# Altium PCB 天地通门禁2074.PcbDoc (part 2 of 2)
Units mil, origin at the board's own origin, x right, y up, seen from the top; angles counter-clockwise.
Board outline 4047 x 2860 mil, 2 copper layers (Top Layer, Bottom Layer); 106 components, 66 nets, 310 pads, 377 vias.
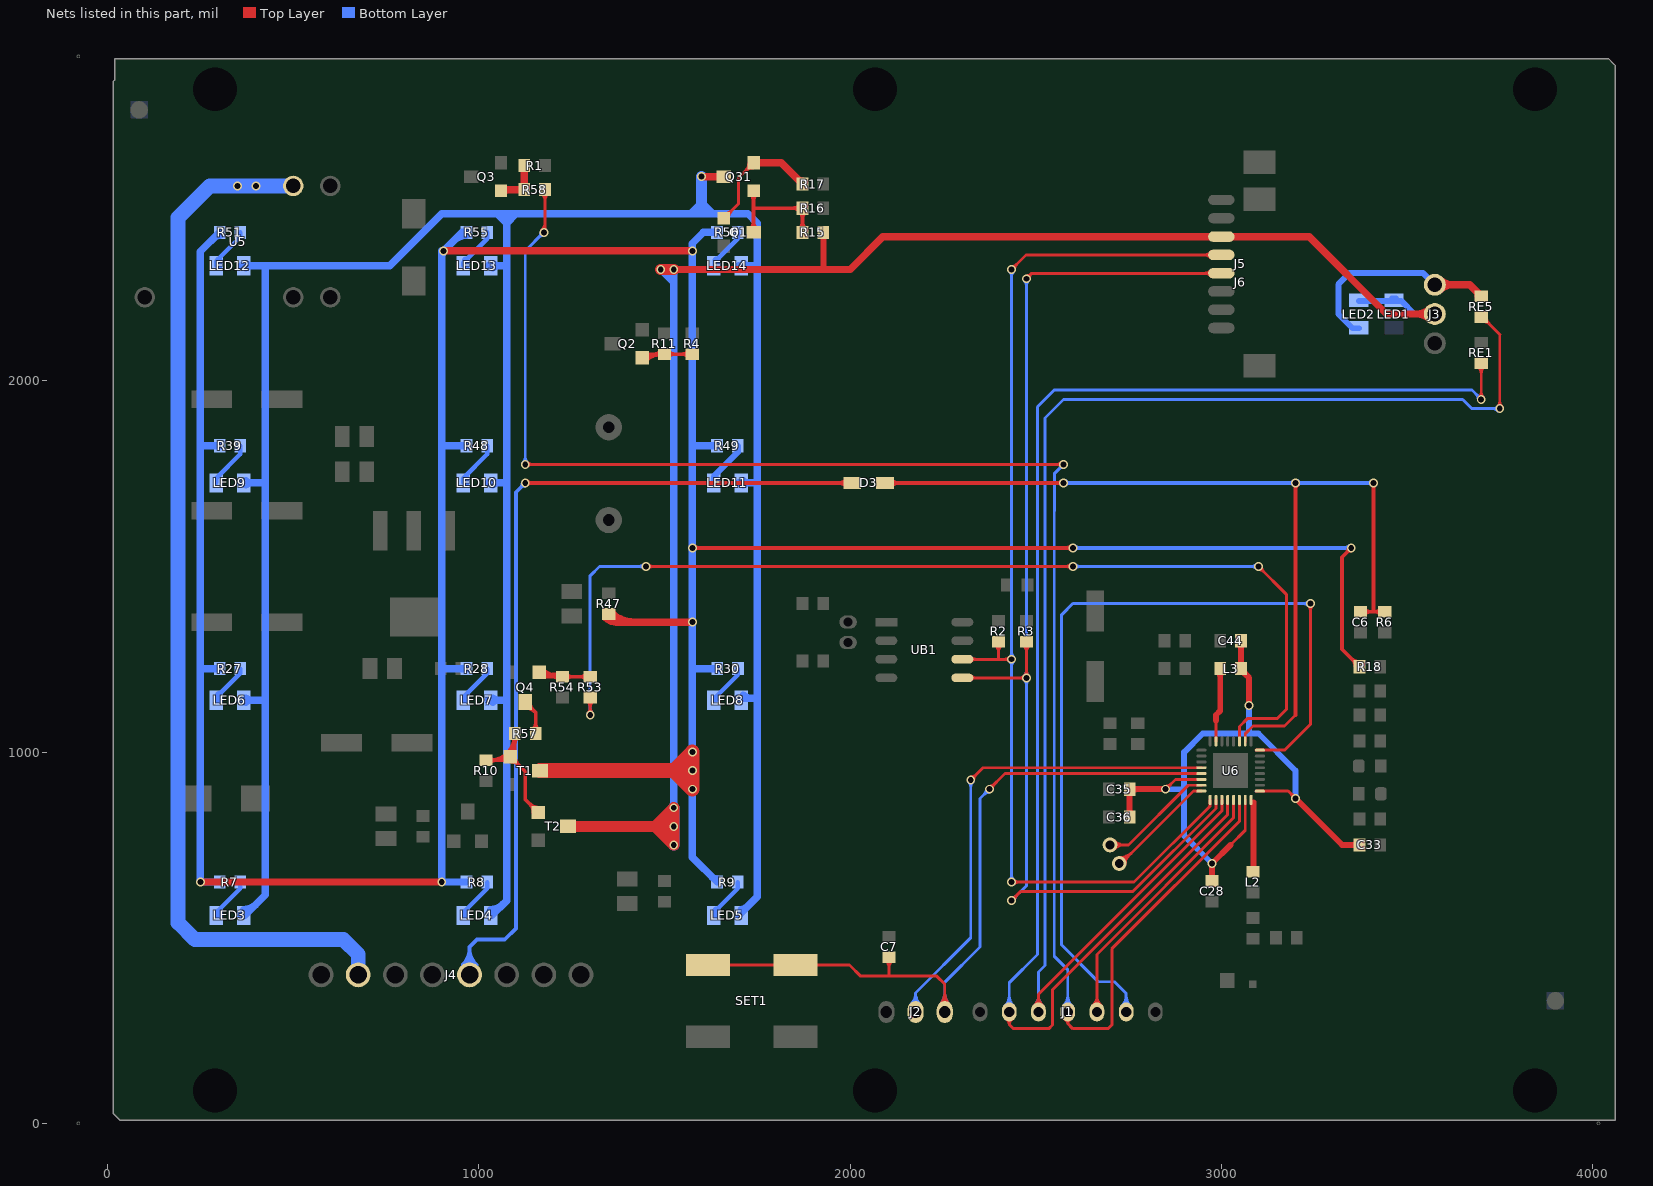
[diagram p2: the nets of this part, all layers, seen from the top]

## Via types
v1: diameter 24, hole 16, Top Layer to Bottom Layer, tented both sides, 377 vias

## Nets (pads, with @x,y where several pads share a name; then routed paths per layer and width w, separated by ;. In a path a pad name is that pad's centre, name@x,y a point inside that pad or via, vN(x,y) a via of type N, cw(c..) or ccw(c..) an arc to the next point about the centre after c; other vN are vias at no path point) (continued)
NetD3_1: D3.1 J4.4 | length 2573.6
  Top Layer w10: v1(1125,1725) D3.1@2010.63,1725 ; v1@1129.95,1720.05 cw(c1141.9,1708.1) 1141.9,1725 cw(c1141.9,1741.9) v1@1129.95,1729.95 ; D3.1@1988.35,1717.4 ccw(c1970,1699.05) 1970,1725 ccw(c1970,1750.95) D3.1@1988.35,1732.6
  Bottom Layer w10: J4.4@956.26,426.61 ccw(c911.03,471.84) 975,471.84 ccw(c1038.97,471.84) J4.4@993.74,426.61 ; J4.4@963.34,419.54 ccw(c935.18,447.7) 975,447.7 ccw(c1014.82,447.7) J4.4@986.66,419.54 ; J4.4@975,400 975,475 995,495 1070,495 1100,525 1100,1700 v1(1125,1725) ; v1@1118,1725 cw(c1101.1,1725) 1113.05,1713.05 cw(c1125,1701.1) v1@1125,1718
NetL2_2: L2.2 U6.32 | length 217.3
  Top Layer w15.75: L2.2@3081.4,683.57 ccw(c3069.86,695.11) 3086.18,695.11 ; L2.2@3085,678 3086.18,679.18 3086.18,865 ; 3086.18,698.91 ccw(c3107.88,698.91) L2.2@3092.54,683.57
NetL3_2: L3.2 U6.15 | length 230.8
  Top Layer w7.87: U6.15@2985.63,1028.74 2985.63,1085
  Top Layer w15.75: 2985.63,1085 2985.63,1100 2997,1111.37 L3.2@2997,1225 ; L3.2@2991.43,1217.46 cw(c2977.99,1204.02) 2997,1204.02 cw(c3016.01,1204.02) L3.2@3002.57,1217.46
NetLED3_1: LED3.1 R7.2 | length 126.6
  Bottom Layer w12: LED3.1@292.68,560 292.68,567.69 357.68,632.69 R7.2@357.68,650
  Bottom Layer w20: LED3.1@299.68,560 LED3.1@299.68,569.69
NetLED3_2: LED3.2 LED4.2 LED5.2 LED6.2 LED7.2 LED8.2 LED9.2 LED10.2 LED11.2 LED12.2 LED13.2 LED14.2 Q31.C | length 8163.8
  Top Layer w20: v1(1600,2550) Q31.C@1660,2550
  Bottom Layer w20: LED3.2@359.68,560 370,560 425,615 425,1140 ; LED6.2@359.68,1140 425,1140 ; LED9.2@359.68,1725 425,1725 ; LED12.2@359.68,2310 425,2310 ; LED3.2@366.68,576 ccw(c366.68,622.63) 399.66,589.66 ; LED6.2@372.34,1134.34 cw(c386,1120.69) 386,1140 cw(c386,1159.31) LED6.2@372.34,1145.66 ; LED9.2@372.34,1719.34 cw(c386,1705.69) 386,1725 cw(c386,1744.31) LED9.2@372.34,1730.66 ; LED12.2@372.34,2304.34 cw(c386,2290.69) 386,2310 cw(c386,2329.31) LED12.2@372.34,2315.66 ; LED4.2@1024.68,560 1035,560 1075,600 1075,1140 ; LED7.2@1024.68,1140 1075,1140 ; LED10.2@1024.68,1725 1075,1725 ; LED13.2@1024.68,2310 1075,2310 ; LED4.2@1031.68,576 ccw(c1031.68,622.63) 1064.66,589.66 ; LED7.2@1037.34,1134.34 cw(c1051,1120.69) 1051,1140 cw(c1051,1159.31) LED7.2@1037.34,1145.66 ; LED10.2@1037.34,1719.34 cw(c1051,1705.69) 1051,1725 cw(c1051,1744.31) LED10.2@1037.34,1730.66 ; LED13.2@1037.34,2304.34 cw(c1051,2290.69) 1051,2310 cw(c1051,2329.31) LED13.2@1037.34,2315.66 ; 1600,2475 1600,2450 ; 1650,2450 1630,2450 ; LED5.2@1699.68,560 1750,610.32 1750,1145 ; LED8.2@1699.68,1145 1750,1145 ; LED11.2@1699.68,1725 1750,1725 ; LED14.2@1699.68,2310 1750,2310 ; LED5.2@1706.68,576 ccw(c1706.68,597.73) LED5.2@1722.05,582.36 ; LED11.2@1712.34,1719.34 cw(c1726,1705.69) 1726,1725 cw(c1726,1744.31) LED11.2@1712.34,1730.66 ; LED14.2@1712.34,2304.34 cw(c1726,2290.69) 1726,2310 cw(c1726,2329.31) LED14.2@1712.34,2315.66 ; LED8.2@1712.66,1153.66 ccw(c1733.56,1174.56) 1733.56,1145 ; 425,1140 425,1725 ; 425,1725 425,2310 ; 425,2310 760,2310 900,2450 1050,2450 ; 1050,2450 1075,2450 ; 1050,2450 1075,2425 ; 1075,1140 1075,1725 ; 1075,1725 1075,2310 ; 1075,2310 1075,2425 ; 1075,2425 1075,2450 ; 1075,2425 1100,2450 ; 1075,2450 1100,2450 ; 1100,2450 1570,2450 ; 1570,2450 1600,2450 ; 1570,2450 1600,2480 1630,2450 ; 1600,2450 1630,2450 ; 1630,2450 1725,2450 1750,2425 1750,2310 ; 1750,1145 1750,1725 ; 1750,1725 1750,2310
  Bottom Layer w30: 1600,2480 v1(1600,2550)
NetLED4_1: LED4.1 R8.2 | length 126.6
  Bottom Layer w12: LED4.1@957.68,560 957.68,567.69 1022.68,632.69 R8.2@1022.68,650
  Bottom Layer w20: LED4.1@964.68,560 LED4.1@964.68,569.69
NetLED5_1: LED5.1 R9.2 | length 131.6
  Bottom Layer w12: LED5.1@1632.68,560 1632.68,567.69 1639.68,574.69 1697.68,632.69 R9.2@1697.68,650
  Bottom Layer w20: LED5.1@1639.68,560 LED5.1@1639.68,574.69
NetLED6_1: LED6.1 R27.2 | length 126.6
  Bottom Layer w12: LED6.1@292.68,1140 292.68,1147.69 299.68,1154.69 357.68,1212.69 R27.2@357.68,1225
  Bottom Layer w20: LED6.1@299.68,1140 LED6.1@299.68,1154.69
NetLED7_1: LED7.1 R28.2 | length 121.6
  Bottom Layer w12: LED7.1@957.68,1140 957.68,1147.69 1022.68,1212.69 R28.2@1022.68,1225
  Bottom Layer w20: LED7.1@964.68,1140 LED7.1@964.68,1149.69
NetLED8_1: LED8.1 R30.2 | length 112.2
  Bottom Layer w12: LED8.1@1633,1140 1633,1143 1698,1208 R30.2@1698,1225
  Bottom Layer w20: LED8.1@1639.68,1145 LED8.1@1640,1145
NetLED9_1: LED9.1 R39.2 | length 126.9
  Bottom Layer w12: LED9.1@292.68,1725 292.68,1737.69 357.68,1802.69 R39.2@357.68,1825
NetLED10_1: LED10.1 R48.2 | length 141.6
  Bottom Layer w12: LED10.1@957.68,1725 957.68,1737.69 1022.68,1802.69 R48.2@1022.68,1825
  Bottom Layer w20: LED10.1@964.68,1725 LED10.1@964.68,1739.69
NetLED11_1: LED11.1 R49.2 | length 136.6
  Bottom Layer w16: LED11.1@1632.68,1725 1632.68,1742.69 1697.68,1807.69 R49.2@1697.68,1825
  Bottom Layer w20: LED11.1@1639.68,1725 LED11.1@1639.68,1734.69
NetLED12_1: LED12.1 R51.2 | length 131.6
  Bottom Layer w12: LED12.1@292.68,2310 292.68,2322.69 357.68,2387.69 R51.2@357.68,2400
  Bottom Layer w20: LED12.1@299.68,2310 LED12.1@299.68,2324.69
NetLED13_1: LED13.1 R55.2 | length 131.6
  Bottom Layer w12: LED13.1@957.68,2310 957.68,2317.69 964.68,2324.69 1022.68,2382.69 R55.2@1022.68,2400
  Bottom Layer w20: LED13.1@964.68,2310 LED13.1@964.68,2324.69
NetLED14_1: LED14.1 R56.2 | length 114
  Bottom Layer w12: LED14.1@1639.68,2324.69 1697.68,2382.69 R56.2@1697.68,2400
  Bottom Layer w20: LED14.1@1639.68,2310 LED14.1@1639.68,2324.69
NetQ1_B: Q1.B Q31.E R17.2 | length 450.1
  Top Layer w8: Q1.B@1660,2437.4 1700,2477.4 1700,2547.4 Q31.E@1740,2587.4 ; Q1.B@1660,2450.13 ccw(c1660,2480.87) 1681.74,2459.14 ccw(c1703.47,2437.4) Q1.B@1672.73,2437.4 ; 1716.1,2563.5 cw(c1740,2539.6) Q31.E@1740,2573.4 ; 1719.16,2566.56 ccw(c1699.59,2586.13) Q31.E@1727.27,2586.13
  Top Layer w20: Q31.E@1740,2587.4 1814.6,2587.4 R17.2@1872,2530 ; R17.2@1858.83,2543.17 ccw(c1872,2556.35) R17.2@1872,2537.72
NetQ1_C: Q1.C Q31.B R15.1 R16.2 | length 520.9
  Top Layer w10: Q1.C@1731.7,2408.3 ccw(c1711.68,2428.32) 1740,2428.32 ccw(c1768.32,2428.32) Q1.C@1748.3,2408.3 ; Q31.B@1731.7,2504.3 cw(c1711.68,2484.27) 1740,2484.27 cw(c1768.32,2484.27) Q31.B@1748.3,2504.3 ; Q1.C@1740,2400 1740,2465 ; Q31.B@1740,2512.6 1740,2465 ; R15.1@1864.4,2409.57 ccw(c1846.05,2427.92) 1872,2427.92 ccw(c1897.95,2427.92) R15.1@1879.6,2409.57 ; R16.2@1864.4,2455.43 cw(c1846.05,2437.08) 1872,2437.08 cw(c1897.95,2437.08) R16.2@1879.6,2455.43 ; R16.2@1864.4,2457.4 ccw(c1846.05,2439.05) 1846.05,2465 ccw(c1846.05,2490.95) R16.2@1864.4,2472.6 ; R15.1@1872,2400 R16.2@1872,2465 1740,2465
NetQ2_1: Q2.1 R4.1 R11.1 | length 341.9
  Top Layer w10: Q2.1@1440,2062.6 1449.4,2072 R11.1@1500,2072 R4.1@1575,2072 ; Q2.1@1442.12,2060.48 cw(c1469.94,2032.66) 1469.94,2072 ; Q2.1@1449.19,2053.41 cw(c1494.08,2008.51) R11.1@1494.08,2072 ; R11.1@1490.43,2064.4 ccw(c1472.08,2046.05) 1472.08,2072 ccw(c1472.08,2097.95) R11.1@1490.43,2079.6 ; R11.1@1509.57,2064.4 cw(c1527.92,2046.05) 1527.92,2072 cw(c1527.92,2097.95) R11.1@1509.57,2079.6 ; R4.1@1565.43,2064.4 ccw(c1547.08,2046.05) 1547.08,2072 ccw(c1547.08,2097.95) R4.1@1565.43,2079.6
NetQ3_B: Q3.B R1.2 R58.2 | length 147.5
  Top Layer w20: Q3.B@1059.68,2512.6 1062.09,2515 R58.2@1122,2515 R1.2@1122,2580 ; Q3.B@1064.45,2507.84 cw(c1081.74,2490.55) 1081.74,2515
NetQ4_1: Q4.1 R53.2 R54.2 | length 400.3
  Top Layer w10: Q4.1@1162.4,1215 1174.4,1203 R54.2@1225,1203 R53.2@1300,1203 ; Q4.1@1164.52,1217.12 ccw(c1198.62,1251.21) 1198.62,1203 ; Q4.1@1171.59,1224.19 ccw(c1222.76,1275.36) R54.2@1222.76,1203 ; 1197.78,1209.69 ccw(c1204.56,1234.99) R54.2@1217.66,1212.31 ; 1198.11,1209.6 cw(c1191.46,1184.77) R54.2@1213.72,1197.63 ; R54.2@1215.43,1195.4 ccw(c1197.08,1177.05) 1197.08,1203 ccw(c1197.08,1228.95) R54.2@1215.43,1210.6 ; R54.2@1234.57,1195.4 cw(c1252.92,1177.05) 1252.92,1203 cw(c1252.92,1228.95) R54.2@1234.57,1210.6 ; R53.2@1290.43,1195.4 ccw(c1272.08,1177.05) 1272.08,1203 ccw(c1272.08,1228.95) R53.2@1290.43,1210.6
NetQ4_3: Q4.3 R57.2 | length 186
  Top Layer w10: Q4.3@1125,1135 1153,1107 ; Q4.3@1125.15,1118.35 cw(c1125.6,1079.6) 1153,1107 ; Q4.3@1138,1131.35 ccw(c1160.56,1131.35) 1144.61,1115.39 ; R57.2@1145.4,1059.57 ccw(c1127.05,1077.92) 1153,1077.92 ccw(c1178.95,1077.92) R57.2@1160.6,1059.57 ; R57.2@1153,1050 1153,1107
NetR10_2: R10.2 R57.1 T1.G T2.G | length 673.4
  Top Layer w10: R10.2@1019.68,978 1075.6,978 T1.G@1085,987.4 ; R10.2@1029.25,970.4 cw(c1047.6,952.05) 1047.6,978 cw(c1047.6,1003.95) R10.2@1029.25,985.6 ; R10.2@1030.92,978 ccw(c1030.92,1041.49) 1075.81,996.59 ccw(c1024.64,1047.76) R57.1@1097,1047.76 ; 1055.06,978 ccw(c1055.06,1017.34) 1082.88,989.52 ccw(c1048.79,1023.62) 1097,1023.62 ; T1.G@1085,974.4 cw(c1085,943.02) 1107.19,965.21 cw(c1129.38,987.4) T1.G@1098,987.4 ; R57.1@1089.4,1040.43 cw(c1071.05,1022.08) 1097,1022.08 cw(c1122.95,1022.08) R57.1@1104.6,1040.43 ; R57.1@1097,1050 1097,999.4 T1.G@1085,987.4 ; T2.G@1147,837.4 ccw(c1115.62,837.4) 1137.81,859.59 ccw(c1160,881.79) T2.G@1160,850.4 ; T2.G@1160,837.4 1125,872.4 1125,947.4 T1.G@1085,987.4
NO: J4.7 U5.3 | length 2820.4
  Bottom Layer w40: U5.3@500,2525 275,2525 190,2440 190,540 235,495 635,495 675,455 J4.7@675,400
  other v1: 350,2525 400,2525
P04/LED_RED: J1.3 RE5.2 U6.27 | length 4133.5
  Top Layer w7.87: J1.3@2496.34,317.04 ccw(c2469.46,343.92) 2507.48,343.92 ccw(c2545.5,343.92) J1.3@2518.62,317.04 ; J1.3@2507.48,300 2507.48,347.48 3001.38,841.38 U6.27@3001.38,871.26 ; v1@3744.3,1930.7 ccw(c3730.53,1944.47) 3750,1944.47 ccw(c3769.47,1944.47) v1@3755.7,1930.7 ; v1(3750,1925) 3750,2125
  Top Layer w8: RE5.2@3700,2172 3703,2172 3750,2125 ; RE5.2@3701.97,2160.25 cw(c3701.97,2129.4) 3723.78,2151.22 ; RE5.2@3713.72,2172 ccw(c3739.59,2172) 3721.29,2153.71
  Bottom Layer w7.87: 2525,1765 2525,1900 2575,1950 3650,1950 3675,1925 v1(3750,1925) ; v1@3744.3,1919.3 ccw(c3730.53,1905.53) 3730.53,1925 ccw(c3730.53,1944.47) v1@3744.3,1930.7
  Bottom Layer w8: J1.3@2496.39,317 ccw(c2469.61,343.77) 2507.48,343.77 ccw(c2545.35,343.77) J1.3@2518.57,317 ; J1.3@2507.48,300 2507.48,407.48 2525,425 2525,1765
P05/LED_GREEN: J1.2 RE1.2 U6.28 | length 4143.3
  Top Layer w7.87: J1.2@2420.63,280.6 cw(c2412.02,266.26) 2428.74,266.26 ; J1.2@2428.74,300 2428.74,266.26 ; J1.2@2436.85,280.6 ccw(c2445.46,266.26) 2428.74,266.26 ; U6.28@3017.13,871.26 3017.13,832.13 2545,360 2545,265 2535,255 2440,255 2428.74,266.26 ; RE1.2@3691.65,2038.65 cw(c3671.49,2018.49) 3700,2018.49 cw(c3728.51,2018.49) RE1.2@3708.35,2038.65 ; v1@3694.3,1955.7 ccw(c3680.53,1969.47) 3700,1969.47 ccw(c3719.47,1969.47) v1@3705.7,1955.7 ; v1(3700,1950) RE1.2@3700,2047
  Bottom Layer w7.87: J1.2@2417.6,317.04 ccw(c2390.72,343.92) 2428.74,343.92 ccw(c2466.76,343.92) J1.2@2439.88,317.04 ; J1.2@2428.74,300 2428.74,378.74 2505,455 2505,1930 2550,1975 3675,1975 v1(3700,1950) ; v1@3691.94,1950 ccw(c3672.47,1950) 3686.24,1963.76 ccw(c3700,1977.53) v1@3700,1958.06
P06/MOTO1: J1.5 U6.29 | length 783.4
  Top Layer w7.87: J1.5@2653.83,317.04 ccw(c2626.94,343.92) 2664.96,343.92 ccw(c2702.98,343.92) J1.5@2676.1,317.04 ; J1.5@2664.96,300 2664.96,454.96 3032.87,822.87 U6.29@3032.87,871.26
P07/MOTO0: J1.4 R58.1 U6.30 | length 4935.3
  Top Layer w7.87: v1@1169.3,2405.7 ccw(c1148.29,2426.71) 1178,2426.71 ; R58.1@1169.65,2504.68 cw(c1149.49,2484.52) 1178,2484.52 cw(c1206.51,2484.52) R58.1@1186.35,2504.68 ; v1(1175,2400) 1178,2403 R58.1@1178,2515 ; 1178,2412.22 ccw(c1187.22,2412.22) v1@1180.7,2405.7 ; J1.4@2579.26,279.97 cw(c2573.75,268.78) 2586.22,268.78 ; J1.4@2586.22,300 2586.22,268.78 ; J1.4@2593.18,279.97 ccw(c2598.69,268.78) 2586.22,268.78 ; U6.30@3048.62,871.26 3048.62,813.62 2705,470 2705,265 2695,255 2600,255 2586.22,268.78
  Top Layer w8: v1(1125,1775) v1(2575,1775) ; v1@1130.66,1769.34 cw(c1144.31,1755.69) 1144.31,1775 cw(c1144.31,1794.31) v1@1130.66,1780.66 ; v1@2569.34,1769.34 ccw(c2555.69,1755.69) 2555.69,1775 ccw(c2555.69,1794.31) v1@2569.34,1780.66
  Bottom Layer w7.87: 2550,1650 2550,450 2586.22,413.78 J1.4@2586.22,300 ; J1.4@2575.08,317.04 ccw(c2548.2,343.92) 2586.22,343.92 ccw(c2624.24,343.92) J1.4@2597.36,317.04
  Bottom Layer w8: v1@1119.34,1780.66 ccw(c1105.69,1794.31) 1125,1794.31 ccw(c1144.31,1794.31) v1@1130.66,1780.66 ; v1(1125,1775) 1125,2350 v1(1175,2400) ; v1@1167,2400 cw(c1147.69,2400) 1161.34,2386.34 cw(c1175,2372.69) v1@1175,2392 ; 2550,1650 2550,1750 v1(2575,1775) ; v1@2567,1775 cw(c2547.69,1775) 2561.34,1761.34 cw(c2575,1747.69) v1@2575,1767
PWR_CTL: R53.1 U6.11 | length 3121.4
  Top Layer w7.87: U6.11@3048.62,1028.74 3048.62,1068.62 3070,1090 3150,1090 3175,1115 3175,1425 v1(3100,1500) ; v1@3100,1491.94 cw(c3100,1472.47) 3113.76,1486.24 cw(c3127.53,1500) v1@3108.06,1500
  Top Layer w8: R53.1@1291.69,1138.69 cw(c1271.64,1118.64) 1300,1118.64 cw(c1328.36,1118.64) R53.1@1308.31,1138.69 ; v1@1294.34,1105.66 ccw(c1280.69,1119.31) 1300,1119.31 ccw(c1319.31,1119.31) v1@1305.66,1105.66 ; v1(1300,1100) R53.1@1300,1147 ; v1(1450,1500) v1(2600,1500) ; v1@1455.66,1494.34 cw(c1469.31,1480.69) 1469.31,1500 cw(c1469.31,1519.31) v1@1455.66,1505.66 ; v1@2594.34,1494.34 ccw(c2580.69,1480.69) 2580.69,1500 ccw(c2580.69,1519.31) v1@2594.34,1505.66
  Bottom Layer w8: v1@1294.34,1105.66 ccw(c1280.69,1119.31) 1300,1119.31 ccw(c1319.31,1119.31) v1@1305.66,1105.66 ; v1(1300,1100) 1300,1475 1325,1500 v1(1450,1500) ; v1@1444.34,1494.34 ccw(c1430.69,1480.69) 1430.69,1500 ccw(c1430.69,1519.31) v1@1444.34,1505.66 ; v1(2600,1500) v1(3100,1500) ; v1@2605.66,1494.34 cw(c2619.31,1480.69) 2619.31,1500 cw(c2619.31,1519.31) v1@2605.66,1505.66 ; v1@3094.34,1494.34 ccw(c3080.69,1480.69) 3080.69,1500 ccw(c3080.69,1519.31) v1@3094.34,1505.66
RD1: pad.2@2700,750 U6.23 | length 373.7
  Top Layer w7.87: pad.2@2700,750 2750,750 2910.63,910.63 U6.23@2946.26,910.63 ; pad.2@2711.36,738.64 cw(c2738.78,711.22) 2738.78,750 cw(c2738.78,788.78) pad.2@2711.36,761.36
RED: J3.1 LED2.2 RE5.1 | length 663.5
  Top Layer w20: J3.1@3575,2258.74 3669.26,2258.74 RE5.1@3700,2228 ; J3.1@3588.81,2244.93 cw(c3622.14,2211.6) 3622.14,2258.74 cw(c3622.14,2305.88) J3.1@3588.81,2272.55 ; RE5.1@3686.83,2241.17 cw(c3673.65,2228) RE5.1@3692.28,2228
  Bottom Layer w16: LED2.2@3370.83,2141.63 3353.37,2141.63 3315,2180 3315,2260 3345,2290 3543.74,2290 J3.1@3575,2258.74
REMOTO: C6.2 D3.2 R6.1 U6.10 | length 2843
  Top Layer w7.87: U6.10@3064.37,1028.74 3064.37,1049.37 3085,1070 3170,1070 3200,1100
  Top Layer w10: D3.2@2089.37,1725 v1(2575,1725) ; D3.2@2111.65,1717.4 cw(c2130,1699.05) 2130,1725 cw(c2130,1750.95) D3.2@2111.65,1732.6 ; v1@2570.05,1720.05 ccw(c2558.1,1708.1) 2558.1,1725 ccw(c2558.1,1741.9) v1@2570.05,1729.95 ; v1@3195.05,1720.05 cw(c3183.1,1708.1) 3200,1708.1 cw(c3216.9,1708.1) v1@3204.95,1720.05 ; 3200,1100 v1(3200,1725) ; C6.2@3375,1378 3410,1378 ; C6.2@3384.57,1370.4 cw(c3402.92,1352.05) 3402.92,1378 cw(c3402.92,1403.95) C6.2@3384.57,1385.6 ; v1@3405.05,1720.05 cw(c3393.1,1708.1) 3410,1708.1 cw(c3426.9,1708.1) v1@3414.95,1720.05 ; v1(3410,1725) 3410,1378 ; R6.1@3430.43,1370.4 ccw(c3412.08,1352.05) 3412.08,1378 ccw(c3412.08,1403.95) R6.1@3430.43,1385.6 ; R6.1@3440,1378 3410,1378
  Bottom Layer w10: v1(2575,1725) v1(3200,1725) v1(3410,1725) ; v1@2579.95,1720.05 cw(c2591.9,1708.1) 2591.9,1725 cw(c2591.9,1741.9) v1@2579.95,1729.95 ; v1@3195.05,1720.05 ccw(c3183.1,1708.1) 3183.1,1725 ccw(c3183.1,1741.9) v1@3195.05,1729.95 ; v1@3204.95,1720.05 cw(c3216.9,1708.1) 3216.9,1725 cw(c3216.9,1741.9) v1@3204.95,1729.95 ; v1@3405.05,1720.05 ccw(c3393.1,1708.1) 3393.1,1725 ccw(c3393.1,1741.9) v1@3405.05,1729.95
RSTN: J1.6 U6.8 | length 2471.1
  Top Layer w7.87: U6.8@3093.74,1005.12 3170.12,1005.12 3240,1075 v1(3240,1400) ; v1@3234.3,1394.3 cw(c3220.53,1380.53) 3240,1380.53 cw(c3259.47,1380.53) v1@3245.7,1394.3
  Bottom Layer w7.87: J1.6@2732.57,317.04 ccw(c2705.68,343.92) 2743.7,343.92 ccw(c2781.72,343.92) J1.6@2754.84,317.04 ; J1.6@2743.7,300 2743.7,350 2712.4,381.3 2668.7,381.3 2570,480 2570,1370 2600,1400 v1(3240,1400) ; v1@3234.3,1394.3 ccw(c3220.53,1380.53) 3220.53,1400 ccw(c3220.53,1419.47) v1@3234.3,1405.7
RX2/SETKEY: C7.1 J2.1 SET1.2 SET1.2/2 U6.21 | length 2494
  Top Layer w7.87: v1(2375,900) 2417.06,942.06 2481.55,942.06 2481.61,942.13 U6.21@2936.26,942.13 ; v1@2375,908.06 ccw(c2375,927.53) 2388.76,913.76 ccw(c2402.53,900) v1@2383.06,900
  Top Layer w8: SET1.2/2@1616.89,426.46 SET1.2@1853.11,426.46 1998.54,426.46 2028.54,396.46 2105,396.46 ; SET1.2@1865.84,413.73 cw(c1896.57,383) 1896.57,426.46 cw(c1896.57,469.91) SET1.2@1865.84,439.18 ; SET1.2@1871.49,408.07 cw(c1915.88,363.69) 1915.88,426.46 cw(c1915.88,489.23) SET1.2@1871.49,444.84 ; C7.1@2096.69,438.69 cw(c2076.64,418.64) 2105,418.64 cw(c2133.36,418.64) C7.1@2113.31,438.69 ; C7.1@2105,447 2105,396.46 ; J2.1@2242.52,320.36 ccw(c2212.38,350.49) 2255,350.49 ccw(c2297.62,350.49) J2.1@2267.48,320.36 ; J2.1@2248.17,314.7 ccw(c2231.69,331.18) 2255,331.18 ccw(c2278.31,331.18) J2.1@2261.83,314.7 ; J2.1@2255,300 2255,375 2233.54,396.46 2105,396.46
  Bottom Layer w7.87: J2.1@2242.47,320.4 ccw(c2212.23,350.65) 2255,350.65 ccw(c2297.77,350.65) J2.1@2267.53,320.4 ; J2.1@2248.04,314.83 ccw(c2231.24,331.64) 2255,331.64 ccw(c2278.76,331.64) J2.1@2261.96,314.83 ; J2.1@2255,300 2255,380 2350,475 2350,875 v1(2375,900) ; v1@2366.94,900 cw(c2347.47,900) 2361.24,886.24 cw(c2375,872.47) v1@2375,891.94
SCL: J5.5 J6.5 R2.2 U6.25 UB1.6 | length 3419.9
  Top Layer w7.87: 2535,650 2765,650 2969.88,854.88 U6.25@2969.88,871.26 ; 2965.26,850.26 ccw(c2954.1,861.42) U6.25@2969.88,861.42
  Top Layer w8: UB1.6@2302.36,1250 2400,1250 ; UB1.6@2325.6,1244.48 cw(c2338.94,1231.14) 2338.94,1250 cw(c2338.94,1268.86) UB1.6@2325.6,1255.52 ; R2.2@2391.69,1288.69 cw(c2371.64,1268.64) 2400,1268.64 cw(c2428.36,1268.64) R2.2@2408.31,1288.69 ; R2.2@2400,1297 2400,1250 ; v1@2429.34,1244.34 ccw(c2415.69,1230.69) 2415.69,1250 ccw(c2415.69,1269.31) v1@2429.34,1255.66 ; v1(2435,650) 2535,650 ; v1(2435,1250) 2400,1250 ; v1(2435,2300) 2473.82,2338.82 J6.5@3000,2338.82 ; v1@2435,2308 ccw(c2435,2327.31) 2448.66,2313.66 ccw(c2462.31,2300) v1@2443,2300 ; v1@2440.66,644.34 cw(c2454.31,630.69) 2454.31,650 cw(c2454.31,669.31) v1@2440.66,655.66 ; 2952.84,2338.82 ccw(c2952.84,2365.12) J6.5@2971.43,2346.52 ; 2956.64,2338.82 cw(c2956.64,2317.9) J6.5@2971.43,2332.69 ; J6.5@2971.43,2331.9 ccw(c2954.74,2315.21) 2954.74,2338.82 ccw(c2954.74,2362.43) J6.5@2971.43,2345.73
  Bottom Layer w7.87: 2435,2090 2435,2145
  Bottom Layer w8: v1@2429.34,655.66 ccw(c2415.69,669.31) 2435,669.31 ccw(c2454.31,669.31) v1@2440.66,655.66 ; v1@2429.34,1244.34 cw(c2415.69,1230.69) 2435,1230.69 cw(c2454.31,1230.69) v1@2440.66,1244.34 ; v1@2429.34,1255.66 ccw(c2415.69,1269.31) 2435,1269.31 ccw(c2454.31,1269.31) v1@2440.66,1255.66 ; v1@2429.34,2294.34 cw(c2415.69,2280.69) 2435,2280.69 cw(c2454.31,2280.69) v1@2440.66,2294.34 ; v1(2435,650) v1(2435,1250) 2435,2090 ; 2435,2145 v1(2435,2300)
SDA: J5.4 J6.4 R3.2 U6.26 UB1.5 | length 3559.7
  Top Layer w7.87: 2635,625 2762.27,625 2985.63,848.36 U6.26@2985.63,871.26
  Top Layer w8: UB1.5@2302.36,1200 v1(2475,1200) R3.2@2475,1297 ; UB1.5@2325.6,1194.48 cw(c2338.94,1181.14) 2338.94,1200 cw(c2338.94,1218.86) UB1.5@2325.6,1205.52 ; v1(2435,600) 2460,625 2635,625 ; v1@2435,608 ccw(c2435,627.31) 2448.66,613.66 ccw(c2462.31,600) v1@2443,600 ; R3.2@2466.69,1288.69 cw(c2446.64,1268.64) 2475,1268.64 cw(c2503.36,1268.64) R3.2@2483.31,1288.69 ; v1@2469.34,1194.34 ccw(c2455.69,1180.69) 2455.69,1200 ccw(c2455.69,1219.31) 2469.34,1205.66 ccw(c2455.69,1219.31) 2475,1219.31 ccw(c2494.31,1219.31) v1@2480.66,1205.66 ; v1(2475,2275) 2489.61,2289.61 J6.4@3000,2289.61 ; v1@2475,2283 ccw(c2475,2302.31) 2488.66,2288.66 ccw(c2502.31,2275) v1@2483,2275 ; 2952.84,2289.61 ccw(c2952.84,2315.9) J6.4@2971.43,2297.31 ; 2956.64,2289.61 cw(c2956.64,2268.68) J6.4@2971.43,2283.48 ; J6.4@2971.43,2282.69 ccw(c2954.74,2266) 2954.74,2289.61 ccw(c2954.74,2313.22) J6.4@2971.43,2296.52
  Bottom Layer w8: v1(2435,600) 2475,640 v1(2475,1200) v1(2475,2275) ; v1@2435,608 ccw(c2435,627.31) 2448.66,613.66 ccw(c2462.31,600) v1@2443,600 ; v1@2469.34,1194.34 cw(c2455.69,1180.69) 2475,1180.69 cw(c2494.31,1180.69) v1@2480.66,1194.34 ; v1@2469.34,1205.66 ccw(c2455.69,1219.31) 2475,1219.31 ccw(c2494.31,1219.31) v1@2480.66,1205.66 ; v1@2469.34,2269.34 cw(c2455.69,2255.69) 2475,2255.69 cw(c2494.31,2255.69) v1@2480.66,2269.34
TD1: pad.1@2725,700 U6.24 | length 387.9
  Top Layer w7.87: pad.1@2725,700 2730,700 2924.88,894.88 U6.24@2946.26,894.88 ; pad.1@2725,708.19 ccw(c2725,740.03) 2747.52,717.52 ; pad.1@2725,716.06 ccw(c2725,766.91) 2760.96,730.96 ; pad.1@2741.06,700 cw(c2767.77,700) 2748.89,718.89
TX2: J2.2 U6.20 | length 1485.7
  Top Layer w7.87: v1(2325,925) 2357.87,957.87 U6.20@2946.26,957.87
  Top Layer w8: v1@2325,933 ccw(c2325,952.31) 2338.66,938.66 ccw(c2352.31,925) v1@2333,925
  Bottom Layer w8: J2.2@2163.78,320.36 ccw(c2133.64,350.49) 2176.26,350.49 ccw(c2218.88,350.49) J2.2@2188.74,320.36 ; J2.2@2169.43,314.7 ccw(c2152.95,331.18) 2176.26,331.18 ccw(c2199.57,331.18) J2.2@2183.09,314.7 ; J2.2@2176.26,300 2176.26,351.26 2325,500 v1(2325,925) ; v1@2319.34,919.34 cw(c2305.69,905.69) 2325,905.69 cw(c2344.31,905.69) v1@2330.66,919.34
VDD: C28.2 C33.2 C35.2 C36.2 C44.2 L3.1 U6.1 U6.22 U6.31 | length 2236.3
  Top Layer w7.87: v1(2850,900) 2876.38,926.38 U6.22@2936.26,926.38 ; v1@2850,908.06 ccw(c2850,927.53) 2863.76,913.76 ccw(c2877.53,900) v1@2858.06,900 ; 3025,750 3064.37,789.37 U6.31@3064.37,871.26 ; U6.1@3093.74,894.88 3180.12,894.88 v1(3200,875) ; v1@3191.94,875 ccw(c3172.47,875) 3186.24,888.76 ccw(c3200,902.53) v1@3200,883.06
  Top Layer w16: C36.2@2747.52,832.45 ccw(c2734.29,845.67) 2753,845.67 ccw(c2771.71,845.67) C36.2@2758.48,832.45 ; C35.2@2747.52,892.55 cw(c2734.29,879.33) 2753,879.33 cw(c2771.71,879.33) C35.2@2758.48,892.55 ; C36.2@2753,825 C35.2@2753,900 v1(2850,900) ; C35.2@2758.48,894.52 cw(c2771.71,881.29) 2771.71,900 cw(c2771.71,918.71) C35.2@2758.48,905.48 ; C28.2@2969.52,658.48 ccw(c2956.29,671.71) 2975,671.71 ccw(c2993.71,671.71) C28.2@2980.48,658.48 ; C28.2@2975,653 v1(2975,700) 3025,750 ; L3.1@3047.52,1232.45 ccw(c3034.29,1245.67) 3053,1245.67 ccw(c3071.71,1245.67) L3.1@3058.48,1232.45 ; C44.2@3047.52,1292.55 cw(c3034.29,1279.33) 3053,1279.33 cw(c3071.71,1279.33) C44.2@3058.48,1292.55 ; L3.1@3053,1215.28 cw(c3053,1199.07) L3.1@3064.47,1210.53 ; C44.2@3053,1300 L3.1@3053,1225 3053,1222 3075,1200 v1(3075,1125) ; L3.1@3060.75,1223.03 ccw(c3081.94,1223.03) L3.1@3066.96,1208.04 ; v1(3200,875) 3325,750 C33.2@3372,750 ; C33.2@3366.52,744.52 ccw(c3353.29,731.29) 3353.29,750 ccw(c3353.29,768.71) C33.2@3366.52,755.48
  Bottom Layer w15.75: v1(2850,900) 2900,900 ; 3100,1050 3200,950 v1(3200,875)
  Bottom Layer w16: v1(2975,700) 2900,775 2900,900 2900,1000 2950,1050 3075,1050 ; v1(3075,1125) 3075,1050 ; 3100,1050 3075,1050
VDD3V3: J3.2 J5.6 J6.6 LED1.1 LED2.1 R15.2 T2.D | length 4864.6
  Top Layer w16: R15.2@1922.52,2392.55 cw(c1909.29,2379.33) 1928,2379.33 cw(c1946.71,2379.33) R15.2@1933.48,2392.55 ; 1928,2302 R15.2@1928,2400
  Top Layer w20: v1(1525,2300) 2000,2300 2088.03,2388.03 J6.6@3000,2388.03 3236.97,2388.03 3445,2180 J3.2@3575,2180 ; J3.2@3561.19,2166.19 ccw(c3527.86,2132.86) 3527.86,2180 ccw(c3527.86,2227.14) J3.2@3561.19,2193.81
  Top Layer w30: T2.D@1240,800 1475,800 ; v1(1490,2300) v1(1525,2300) ; 1475,800 v1(1525,750) v1(1525,800) ; 1475,800 v1(1525,800) ; 1475,800 v1(1525,850) v1(1525,800)
  Bottom Layer w16: LED2.1@3370.83,2215.63 3484.37,2215.63 3520,2180 J3.2@3575,2180 ; LED1.1@3459,2222 LED1.1@3470,2222 ; J3.2@3558.24,2166.49 ccw(c3530,2143.74) 3530,2180 ccw(c3530,2216.26) J3.2@3558.24,2193.51
  Bottom Layer w20: v1(1525,850) 1525,2265 ; 1525,2265 v1(1490,2300) v1(1525,2300) 1525,2265
  Bottom Layer w30: v1(1525,750) v1(1525,800) v1(1525,850)
VDD5V: R7.1 R8.1 R9.1 R18.1 R27.1 R28.1 R30.1 R39.1 R47.2 R48.1 R49.1 R51.1 R55.1 R56.1 T1.D | length 10577.6
  Top Layer w10: v1(1575,1550) v1(2600,1550) ; v1@1579.95,1545.05 cw(c1591.9,1533.1) 1591.9,1550 cw(c1591.9,1566.9) v1@1579.95,1554.95 ; v1@2595.05,1545.05 ccw(c2583.1,1533.1) 2583.1,1550 ccw(c2583.1,1566.9) v1@2595.05,1554.95 ; v1@3343,1550 cw(c3326.1,1550) 3338.05,1538.05 cw(c3350,1526.1) v1@3350,1543 ; v1(3350,1550) 3325,1525 3325,1277 R18.1@3372,1230 ; 3350.29,1251.71 ccw(c3372,1273.42) R18.1@3372,1242.72 ; 3355.04,1246.96 cw(c3340.06,1231.97) R18.1@3361.25,1231.97
  Top Layer w20: v1(250,650) v1(900,650) ; v1(905,2350) v1(1575,2350) ; R47.2@1341.89,1361.92 ccw(c1370.67,1390.71) 1370.67,1350 ; R47.2@1350,1372 1372,1350 v1(1575,1350) ; R47.2@1356.03,1376.06 ccw(c1418.96,1438.99) 1418.96,1350 ; R47.2@1357.72,1372 ccw(c1376.35,1372) R47.2@1363.17,1358.83
  Top Layer w40: T1.D@1165,950 1525,950 ; 1525,950 v1(1575,900) v1(1575,950) ; 1525,950 v1(1575,950) ; 1525,950 v1(1575,1000) v1(1575,950)
  Bottom Layer w10: v1(2600,1550) v1(3350,1550) ; v1@2604.95,1545.05 cw(c2616.9,1533.1) 2616.9,1550 cw(c2616.9,1566.9) v1@2604.95,1554.95 ; v1@3345.05,1545.05 ccw(c3333.1,1533.1) 3333.1,1550 ccw(c3333.1,1566.9) v1@3345.05,1554.95
  Bottom Layer w20: R51.1@288.51,2386.83 cw(c301.68,2373.65) R51.1@301.68,2392.28 ; R7.1@301.68,650 v1(250,650) 250,1225 ; R27.1@301.68,1225 250,1225 ; R39.1@301.68,1825 250,1825 ; R51.1@301.68,2400 250,2348.31 250,1825 ; 900,2333.1 cw(c921.9,2333.1) v1@906.41,2348.59 ; 933.56,2378.56 cw(c966.68,2345.44) R55.1@966.68,2392.28 ; R8.1@966.68,650 v1(900,650) 900,1225 ; R28.1@966.68,1225 900,1225 ; R48.1@966.68,1825 900,1825 ; R55.1@966.68,2400 955,2400 v1(905,2350) 900,2350 900,1825 ; v1(1575,900) 1575,716.69 R9.1@1641.68,650 ; v1(1575,1000) 1575,1225 ; R9.1@1628.51,663.17 ccw(c1641.68,676.35) R9.1@1641.68,657.72 ; R30.1@1641.68,1225 1575,1225 ; R49.1@1641.68,1825 1575,1825 ; R56.1@1641.68,2400 1605,2400 1575,2370 v1(1575,2350) 1575,1825 ; 250,1225 250,1825 ; 900,1225 900,1825 ; 1575,1225 v1(1575,1350) v1(1575,1550) 1575,1825
  Bottom Layer w30: v1(1575,900) v1(1575,950) v1(1575,1000)
pads on no net: J5.7 J5.8 U6.5 U6.9 U6.12 U6.13 UB1. UB1.3 UB1.7 Y2.3

## Polygon pours and split planes (outlines as drawn)
GND on Top Layer "Top Layer-GND" (hatched 45Degree grid 11 track 15, remove dead copper, pour order 4): -110,2890 -110,-40 4065,-40 4065,2905 -110,2905
GND on Bottom Layer "Bottom Layer-GND" (hatched 45Degree grid 11 track 15, remove dead copper, pour order 3): -110,2890 -110,-40 4065,-40 4065,2905 -110,2905

## Keep-outs
Keep-Out Layer:
  pour cut-out: -95,2675 725,2675 725,2075 -95,2075
  pour cut-out: 525,475 1120,475 1135,460 1135,310 1120,295 525,295 510,310 510,460
  pour cut-out: 3650,2355 3675,2330 3675,2030 3650,2005 3500,2005 3475,2030 3475,2330 3500,2355
  pour cut-out: 2045,1385 2030,1400 1960,1400 1945,1385 1945,1265 1960,1250 2030,1250 2045,1265
  lines w10: -78.74,157.48 ccw(c78.74,157.48) 78.74,0 3858.27,0 ccw(c3858.27,157.48) 4015.75,157.48 4015.75,2716.54 ccw(c3858.27,2716.54) 3858.27,2874.02 78.74,2874.02 ccw(c78.74,2716.54) -78.74,2716.54 -78.74,157.48

## Other copper
Top Layer:
  region net GND: 3163.17,2431.96 3163.17,2670 3045,2670 3045,2431.96
  region net GND: 3159.65,1991.59 3159.65,2095 3034.44,2095 3034.44,1991.59
  region net GND: 659.32,1680 659.32,1895 583.23,1895 583.23,1680
  region net GND: 375,1275.93 375,2030.4 190,2030.4 190,1275.93
  region net GND: 3050,450 2948.68,450 2948.68,375 3050,375
  region net GND: 3050,375 3013.42,411.59 2978.92,377.09 3015.5,340.5
  region net GND: 3026.13,985.25 3001.38,1010 2980.16,988.79 3004.91,964.04
  region net GND: 995.97,1525 995.97,1682.64 872.02,1682.64 872.02,1525
  region net GND: 3250,450 3250,545 3185,545 3185,450
  region net VDD: 2995,635 2995,670 2955,670 2955,635
  region net VDD: 2995,670 2975,690 2955,670 2975,650
  region net NetL2_2: 3105,660 3105,695.11 3065,695.11 3065,660
  region net NetL2_2: 3105,695.11 3085,715.11 3065,695.11 3085,675.11
  region net GND: 3105,480 3105,515 3065,515 3065,480
  region net GND: 3105,480 3085,500 3065,480 3085,460
  region net VDD: 3075,1205 3075,1320 3035,1320 3035,1205
  region net NetL3_2: 3015,1205 3015,1245 2980,1245 2980,1205
  region net NetL3_2: 3015,1205 2997.5,1222.5 2980,1205 2997.5,1187.5
  region net VDD: 2770,805 2770,920 2735,920 2735,805
  region net VDD: 2790,900 2770,920 2750,900 2770,880
  region net COM: 550,2110 550,2135 535,2150 410,2150 300,2260 170,2260 135,2295 135,2410 120,2425 70,2425 55,2410 55,2205 75,2185 275,2185 360,2100 540,2100
  region net NC: 620,2495 635,2510 635,2585 600,2620 435,2620 425,2610 425,2590 435,2580 545,2580 565,2560 565,2510 580,2495
  region net NO: 460,2560 520,2560 535,2545 535,2505 520,2490 460,2490 445,2505 340,2505 330,2515 330,2535 340,2545 445,2545
  region net 5V: 800,1925 685,2040 685,2150 645,2190 580,2190 565,2205 565,2245 580,2260 735,2260 790,2315 865,2315 865,2230 750,2115 750,2065 850,1965 850,1515 925,1440 925,970 955,940 1100,940 1110,930 1110,890 1100,880 1025,880 1010,865 1010,815 1000,805 720,805 700,825 700,900 750,950 750,1465 800,1515
  region net 20V: 355,810 365,800 475,800 535,860 535,1860 585,1910 665,1910 675,1900 675,1550 700,1525 750,1525 765,1540 765,1920 700,1985 410,1985 400,1975 400,970 355,925
  pour cut-out: 4025,-25 4025,385 3185,385 3170,400 3170,520 3125,565 3125,875 3115,885 3060,885 3045,870 3045,395 3025,375 2975,375 2925,325 2925,-25
  region net NetL2_2: 3094,870 3083,881 3077,881 3077,862 3084,855 3094,855
Bottom Layer:
  region net VDD3V3: 3500,2195 3500,2240 3340,2240 3340,2195
  region net COM: 135,2410 120,2425 70,2425 55,2410 55,2205 75,2185 120,2185 135,2200
  region net NO: 535,2545 520,2560 460,2560 430,2530 430,2520 460,2490 520,2490 535,2505
  region net NC: 580,2495 620,2495 635,2510 635,2585 600,2620 565,2620 535,2590 565,2560 565,2510
  pour cut-out: 4025,-25 4025,375 2975,375 2925,325 2925,-25

## Silkscreen, mask and mechanical layers (free items; w line width, h text height)
Top Overlay:
  circle w10: c289.37,88.58 r141.73
  circle w10: c289.37,2785.43 r141.73
  circle w10: c3844.49,2785.43 r141.73
  circle w10: c3844.49,88.58 r141.73
  circle w10: c2066.93,94.49 r141.73
  circle w10: c2066.93,2779.53 r141.73
  lines w5: 1844.68,39.37 1844.68,2834.65 ; 1844.68,472.44 4015.75,472.44
  lines w10: 3240,1940 4010,1940
  text "NO" at 500,2625 h30
  text "NC" at 600,2625 h30
  text "D3V3" at 2775,2375 h30
  text "SCL" at 2775,2325 h30
  text "SDA" at 2775,2275 h30
  text "R" at 3445,2240 h40
  text "IRQ" at 2775,2225 h30
  text "GND" at 2775,2175 h30
  text "M3V3" at 2775,2125 h30
  text "COM" at 100,2075 h30
  text "G" at 3445,2075 h40
  text "JYD-MJ" at 2200,1825 h80
  text "V1.0" at 2750,1825 h80
  text "20-7-4" at 2250,1625 h80
  text "RD" at 2775,730 h30
  text "TD" at 2775,680 h30
  text "GND" at 2050,360 h30
  text "TX2" at 2190,360 h30 r90
  text "RX2" at 2270,360 h30 r90
  text "+24V" at 550,225 h50 r270
  text "NO" at 650,225 h50 r270
  text "COM" at 750,225 h50 r270
  text "NC" at 850,225 h50 r270
  text "REMO" at 950,225 h50 r270
  text "M3V3" at 1050,225 h50 r270
  text "GND" at 1150,225 h50 r270
  text "GND" at 1250,225 h50 r270
  text "M3V3" at 2335,225 h30 r270
  text "P05" at 2415,225 h30 r270
  text "P04" at 2495,225 h30 r270
  text "P07" at 2570,225 h30 r270
  text "P06" at 2650,225 h30 r270
  text "RSN" at 2730,225 h30 r270
  text "GND" at 2810,225 h30 r270
Bottom Overlay:
  circle w5: c996.06,559.06 r157.48
  circle w5: c330.71,559.06 r157.48
  circle w5: c330.71,1141.73 r157.48
  circle w5: c996.06,1141.73 r157.48
  circle w5: c1661.42,559.06 r157.48
  circle w5: c1661.42,1141.73 r157.48
  circle w5: c1661.42,1724.41 r157.48
  circle w5: c1661.42,2307.09 r157.48
  circle w5: c996.06,2307.09 r157.48
  circle w5: c996.06,1724.41 r157.48
  circle w5: c330.71,1724.41 r157.48
  circle w5: c330.71,2307.09 r157.48
  region: 3691.77,2290 3692.01,2290 3692.01,2052.11 cw(c3592.01,2052.11) 3592.01,1952.11 3530,1952.11 3530,2406.82 3591.77,2406.82 cw(c3591.77,2306.82) 3691.77,2306.82
  region: 3691.77,2065 3691.77,2052.11 cw(c3591.77,2052.11) 3591.77,1952.11 3220.79,1952.11 cw(c3220.79,2052.11) 3120.79,2052.11 3120.79,2064.21
  region: 3591.77,2406.82 cw(c3591.77,2306.82) 3691.77,2306.82 3691.77,2285 3120.79,2285 3120,2306.82 cw(c3220,2306.82) 3220,2406.82
  region: 3120.79,2052.11 ccw(c3220.79,2052.11) 3220.79,1952.11 3300,1952.11 3300,2406.82 3220.79,2406.82 ccw(c3220.79,2306.82) 3120.79,2306.82
  lines w4: 51.18,393.7 51.18,2480.31 1940.94,2480.31 1940.94,393.7 51.18,393.7
  lines w5: -37.4,234.25 -37.4,2639.76 3975,2639.76 3975,234.25 -37.4,234.25 ; 3120.79,2064.21 ccw(c3232.89,2064.21) 3232.89,1952.11 3579.67,1952.11 ccw(c3579.67,2064.21) 3691.77,2064.21 3691.77,2294.72 ccw(c3579.67,2294.72) 3579.67,2406.82 3232.89,2406.82 ccw(c3232.89,2294.72) 3120.79,2294.72 3120.79,2064.21

## Dimensions
-78.74,0 to -78.74,2874.02 on Mechanical 1
-78.74,0 to 4015.75,0 on Mechanical 1